# Altium PCB Overview.PcbDoc
Units mm, origin at the board's own origin, x right, y up, seen from the top; angles counter-clockwise.
Board outline 152.4 x 101.6 mm, 2 copper layers (Top Layer, Bottom Layer); 99 components, 67 nets, 227 pads, 10 vias.
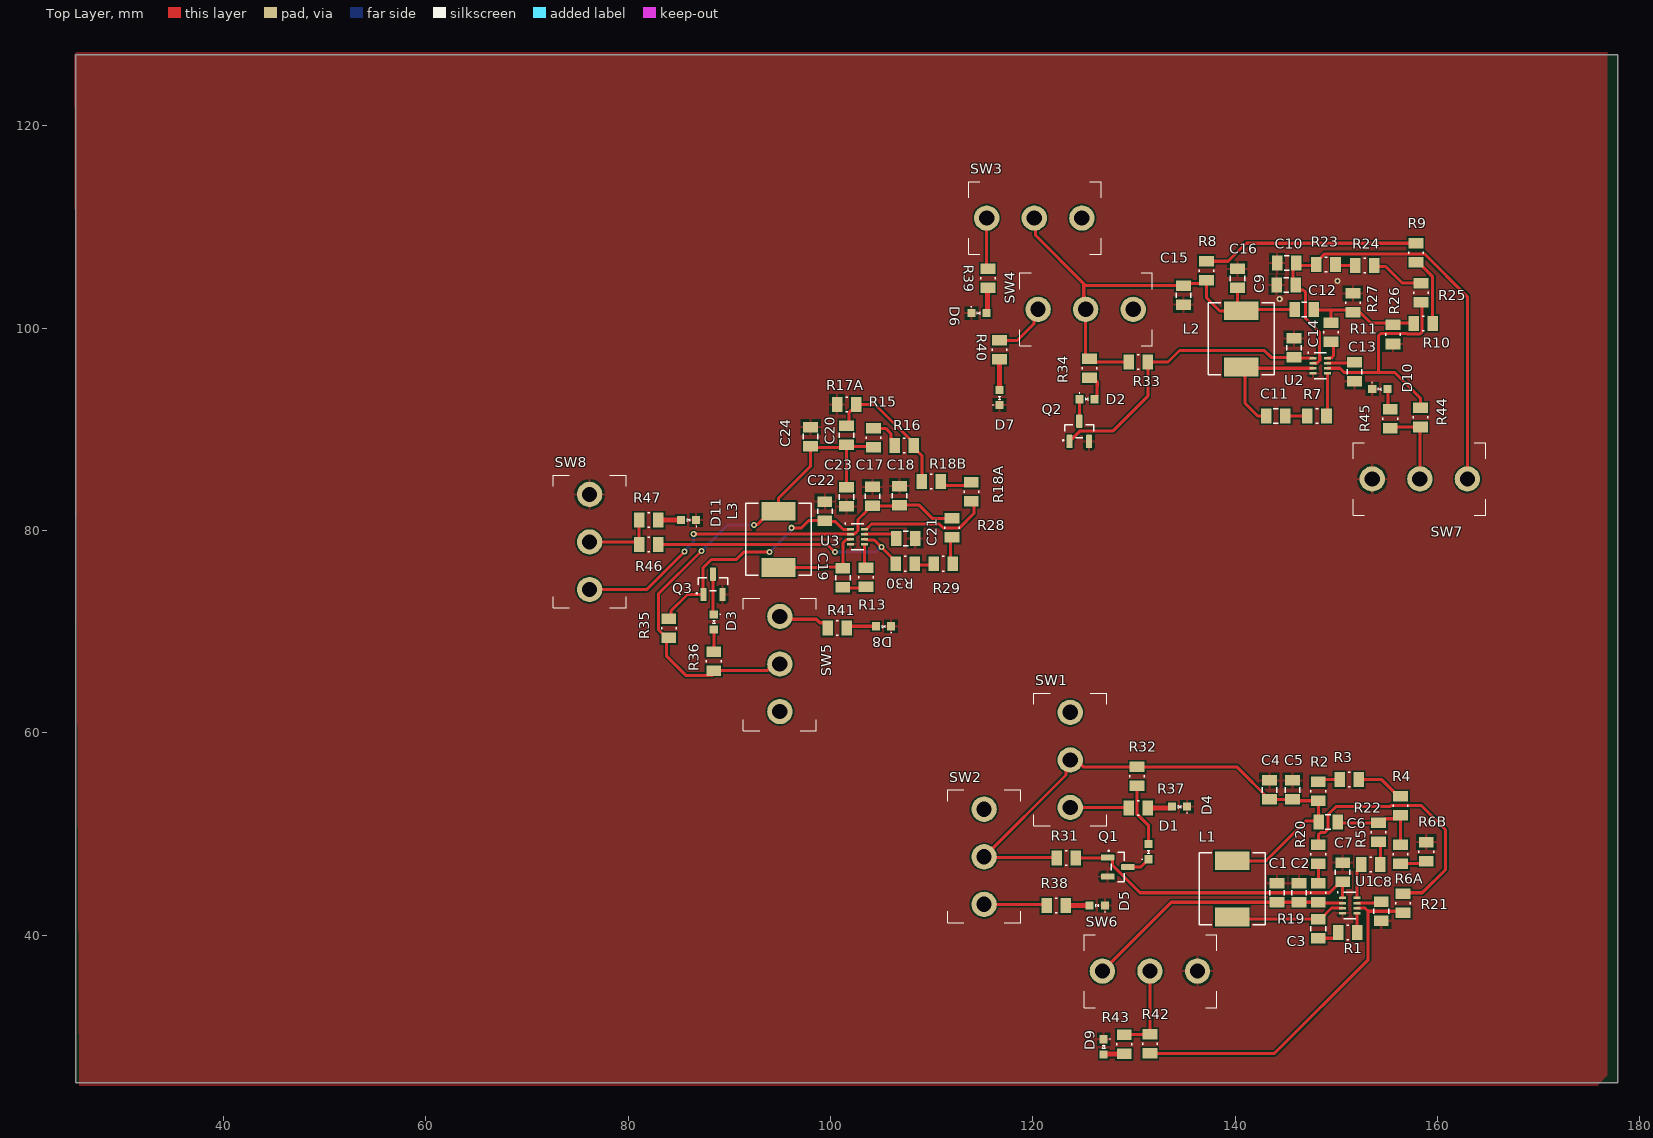
[diagram p0: Top Layer view]
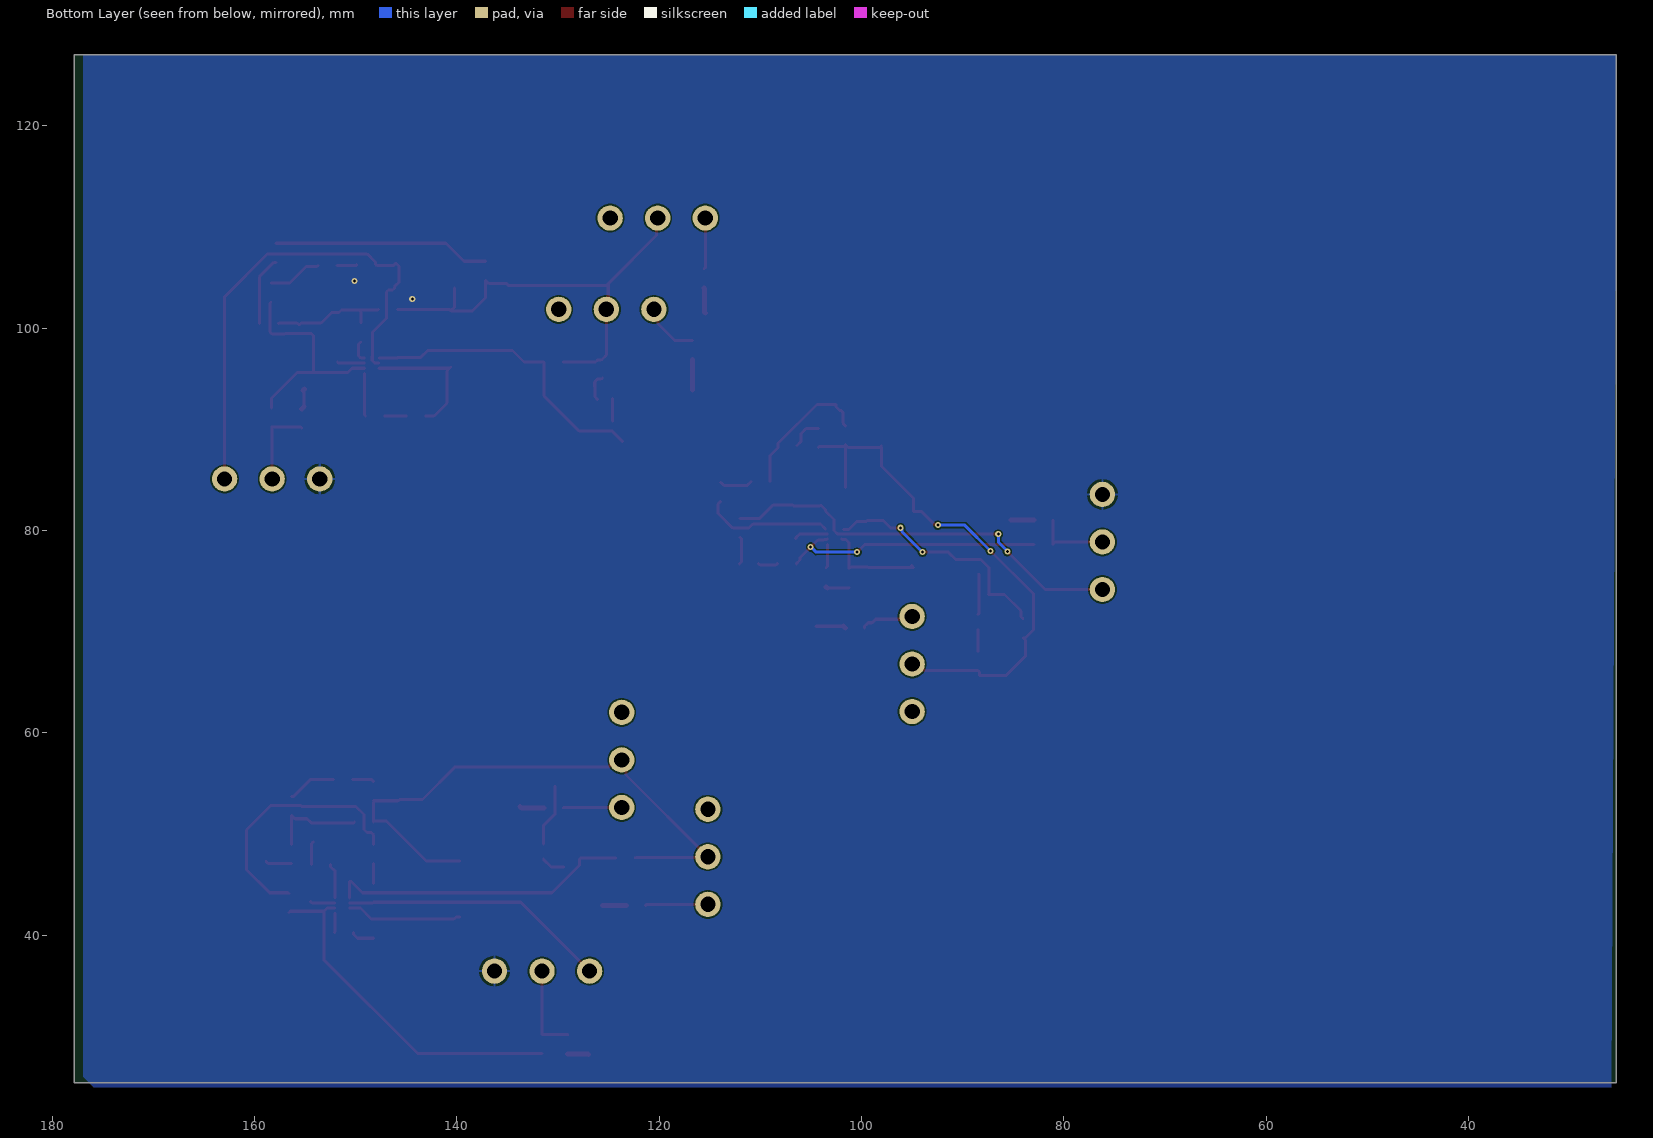
[diagram p1: Bottom Layer view, seen from below]
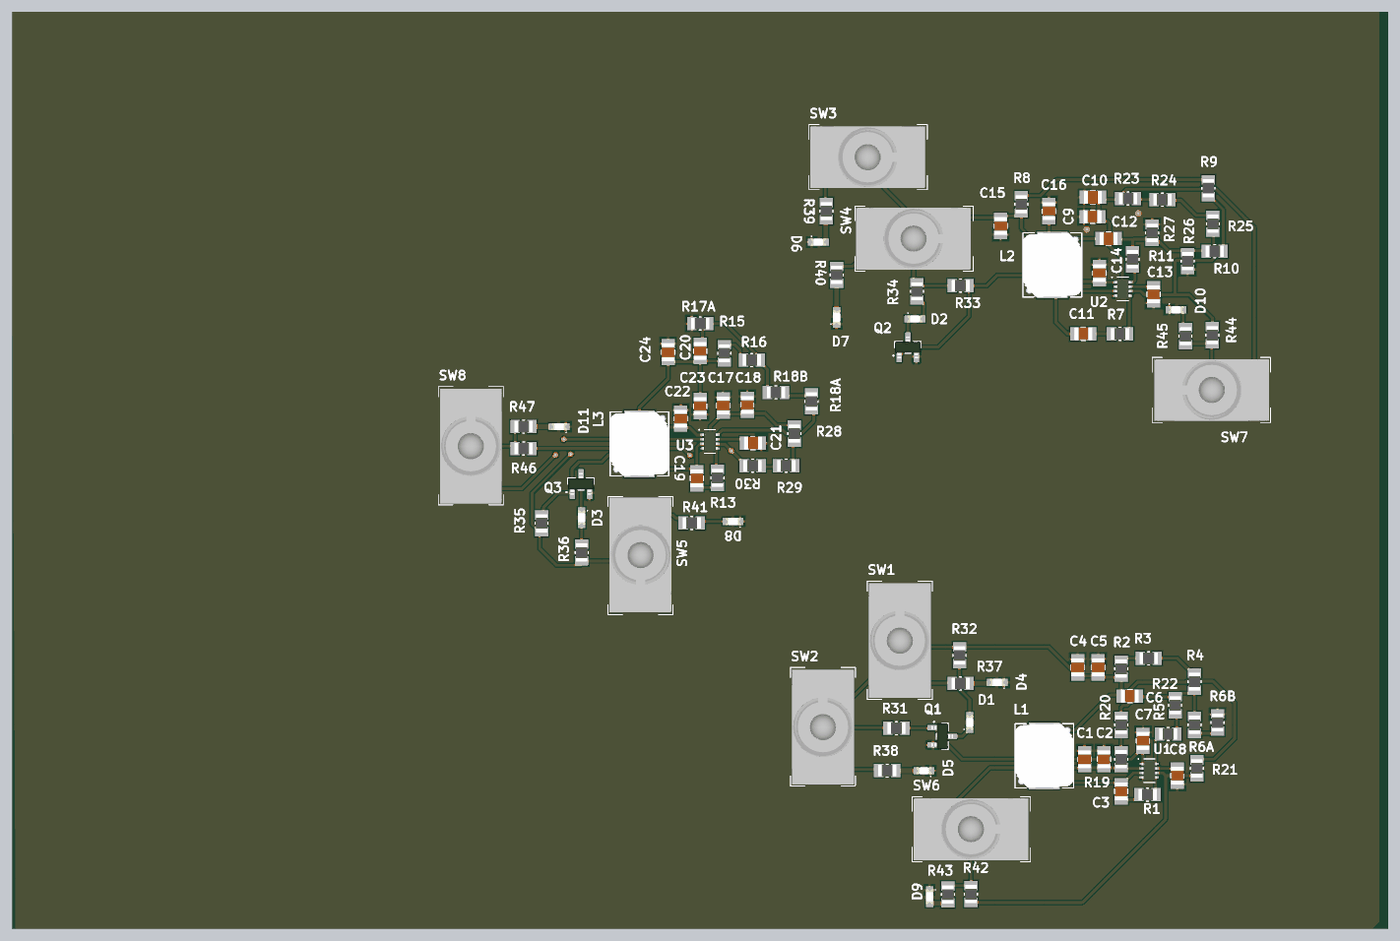
[diagram p2: 3D render of the assembled board from above, using the file's embedded part models]

## Layer stack, top to bottom
Top Solder: solder mask 0.0102, Solder Resist, Dk 3.5
Top Layer: signal copper 0.0356
Dielectric 1: dielectric 0.32, FR-4, Dk 4.8
Bottom Layer: signal copper 0.0356
Bottom Solder: solder mask 0.0102, Solder Resist, Dk 3.5

## Board outline
25.4,25.4 177.8,25.4 177.8,127 25.4,127

## Design rules (kind name [scope] priority, off if disabled: settings)
Clearance [All] p1: gap=0.152 ignorepadtopadclearanceinfootprint=FALSE
HoleSize [All] p1: absolutevalues=TRUE maxlimit=6.2 minlimit=0.3 maxpercent=80.000 minpercent=20.000
MinimumAnnularRing [All] p1: minimumring=0.15
MinimumSolderMaskSliver [All] p1: minsoldermaskwidth=0.1
PolygonConnect ViaConnect [IsVia] p1: connectstyle=Direct reliefconductorwidth=0.254 reliefentries=4 polygonreliefangle="90 Angle" airgapwidth=0.254
PolygonConnect [All] p2: connectstyle=Relief reliefconductorwidth=0.254 reliefentries=4 polygonreliefangle="90 Angle" airgapwidth=0.254
RoutingVias [All] p1: holewidth=0.3 width=0.6 viastyle="Through Hole" minholewidth=0.3 minwidth=0.5 maxholewidth=1 maxwidth=5
SilkToSilkClearance [All] p1: silktosilkclearance=0.1
SilkToSolderMaskClearance [IsPad] p1: minsilkscreentomaskgap=0.1 clearancetoexposedcopper=TRUE
SolderMaskExpansion [All] p1: expansion=0.051 istentingtop=FALSE
SupplyNets "Schematic Supply Nets_11" [InNet('8V_BUS')] p1: voltage=0.000
SupplyNets "Schematic Supply Nets_10" [InNet('8V_IN')] p2: voltage=0.000
SupplyNets "Schematic Supply Nets_9" [InNet('3V3_LUP_BUS')] p3: voltage=0.000
SupplyNets "Schematic Supply Nets_8" [InNet('GND')] p4: voltage=0.000
SupplyNets "Schematic Supply Nets_7" [InNet('5V_IN')] p5: voltage=0.000
SupplyNets "Schematic Supply Nets_6" [InNet('5V_LUP_BUS')] p6: voltage=0.000
SupplyNets "Schematic Supply Nets_5" [InNet('3V3_IN')] p7: voltage=0.000
SupplyNets "Schematic Supply Nets_4" [InNet('5V_BUS')] p8: voltage=0.000
SupplyNets "Schematic Supply Nets_3" [InNet('3V3_OUT')] p9: voltage=0.000
SupplyNets "Schematic Supply Nets_2" [InNet('8V_OUT')] p10: voltage=0.000
SupplyNets "Schematic Supply Nets_1" [InNet('3V3_BUS')] p11: voltage=0.000
SupplyNets "Schematic Supply Nets" [InNet('5V_OUT')] p12: voltage=0.000
Width [All] p1: maxlimit=25.4 minlimit=0.15 preferedwidth=0.3
26 further rules are at their usual default settings.

## Components (designator, comment, footprint, x,y, rotation, side; value= is the part's Value field where it differs from the comment)
C1 "22uF" CAPACITOR_0805_2012M-70N 144.145,44.196 r270 top
C2 "100uF" CAPACITOR_0805_2012M-70N 146.304,44.196 r270 top
C3 "1uF" CAPACITOR_0805_2012M-70N 148.209,40.64 r270 top
C4 "22uF" CAPACITOR_0805_2012M-70N 143.383,54.356 r270 top
C5 "22uF" CAPACITOR_0805_2012M-70N 145.669,54.356 r270 top
C6 "10pF" CAPACITOR_0805_2012M-70N 149.174,51.181 r0 top
C7 "1nF" CAPACITOR_0805_2012M-70N 150.622,46.228 r270 top
C8 "6.8nF" CAPACITOR_0805_2012M-70N 154.432,42.367 r90 top
C9 "100uF" CAPACITOR_0805_2012M-70N 145.034,104.267 r0 top
C10 "22uF" CAPACITOR_0805_2012M-70N 145.085,106.426 r0 top
C11 "1uF" CAPACITOR_0805_2012M-70N 144.018,91.313 r0 top
C12 "10pF" CAPACITOR_0805_2012M-70N 146.812,101.854 r0 top
C13 "6.8nF" CAPACITOR_0805_2012M-70N 151.794,95.685 r90 top
C14 "1nF" CAPACITOR_0805_2012M-70N 145.796,98.044 r270 top
C15 "22uF" CAPACITOR_0805_2012M-70N 134.874,103.251 r90 top
C16 "22uF" CAPACITOR_0805_2012M-70N 140.208,104.902 r270 top
C17 "22uF" CAPACITOR_0805_2012M-70N 104.14,83.363 r270 top
C18 "100uF" CAPACITOR_0805_2012M-70N 106.807,83.439 r270 top
C19 "1uF" CAPACITOR_0805_2012M-70N 101.219,75.311 r270 top
C20 "10pF" CAPACITOR_0805_2012M-70N 101.6,89.408 r90 top
C21 "1nF" CAPACITOR_0805_2012M-70N 107.442,79.209 r180 top
C22 "1nF" CAPACITOR_0805_2012M-70N 99.441,81.915 r270 top
C23 "22uF" CAPACITOR_0805_2012M-70N 101.6,83.312 r90 top
C24 "22uF" CAPACITOR_0805_2012M-70N 98.044,89.281 r270 top
D1 "LTST-C190 Series" LED_0603_1608M_0.80mm 131.445,48.26 r90 top
D2 "LTST-C190 Series" LED_0603_1608M_0.80mm 125.361,92.964 r0 top
D3 "LTST-C190 Series" LED_0603_1608M_0.80mm 88.47,70.955 r270 top
D4 "LTST-C190 Series" LED_0603_1608M_0.80mm 134.493,52.705 r180 top
D5 "LTST-C190 Series" LED_0603_1608M_0.80mm 126.365,42.926 r180 top
D6 "LTST-C190 Series" LED_0603_1608M_0.80mm 114.681,101.473 r0 top
D7 "LTST-C190 Series" LED_0603_1608M_0.80mm 116.713,93.142 r90 top
D8 "LTST-C190 Series" LED_0603_1608M_0.80mm 105.245,70.534 r180 top
D9 "LTST-C190 Series" LED_0603_1608M_0.80mm 127,28.968 r270 top
D10 "LTST-C190 Series" LED_0603_1608M_0.80mm 154.293,93.98 r0 top
D11 "LTST-C190 Series" LED_0603_1608M_0.80mm 85.979,81.026 r180 top
L1 "SPM6530T-3R3M100" IND_SPM6530T-1R5M100 139.7,44.577 r90 top
L2 "SPM6530T-4R7M100" IND_SPM6530T-1R5M100 140.589,98.933 r90 top
L3 "SPM6530T-4R7M100" IND_SPM6530T-1R5M100 94.869,79.121 r90 top
Q1 "MMBT619" SOT23-3N-1.15mm 128.397,46.736 r0 top
Q2 "MMBT619" SOT23-3N-1.15mm 124.587,89.805 r90 top
Q3 "MMBT619" SOT23-3N-1.15mm 88.392,74.676 r90 top
R1 "20" RESISTOR_0805_2012M-50N 151.13,40.259 r180 top
R2 "220" RESISTOR_0805_2012M-50N 148.209,54.229 r270 top
R3 "1k" RESISTOR_0805_2012M-50N 151.257,55.372 r180 top
R4 "39k" RESISTOR_0805_2012M-50N 156.337,52.781 r90 top
R5 "10k" RESISTOR_0805_2012M-50N 153.416,46.99 r0 top
R6A "12k" RESISTOR_0805_2012M-50N 156.337,48.006 r90 top
R6B "1k" RESISTOR_0805_2012M-50N 158.877,48.26 r270 top
R7 "20" RESISTOR_0805_2012M-50N 148.082,91.313 r180 top
R8 "220" RESISTOR_0805_2012M-50N 137.16,105.664 r270 top
R9 "1k" RESISTOR_0805_2012M-50N 157.861,107.442 r90 top
R10 "39k" RESISTOR_0805_2012M-50N 158.572,100.457 r0 top
R11 "15k" RESISTOR_0805_2012M-50N 149.479,99.568 r90 top
R13 "20" RESISTOR_0805_2012M-50N 103.505,75.362 r270 top
R15 "3.3k" RESISTOR_0805_2012M-50N 104.267,89.154 r270 top
R16 "39k" RESISTOR_0805_2012M-50N 107.315,88.392 r180 top
R17A "4.7k" RESISTOR_0805_2012M-50N 101.6,92.456 r0 top
R18A "10k" RESISTOR_0805_2012M-50N 113.919,83.82 r90 top
R18B "10k" RESISTOR_0805_2012M-50N 109.982,84.836 r180 top
R19 "330k" RESISTOR_0805_2012M-50N 148.209,44.196 r270 top
R20 "270k" RESISTOR_0805_2012M-50N 148.209,48.006 r90 top
R21 "3.9k" RESISTOR_0805_2012M-50N 156.591,43.18 r90 top
R22 "10k" RESISTOR_0805_2012M-50N 154.178,50.165 r90 top
R23 "330k" RESISTOR_0805_2012M-50N 148.971,106.299 r180 top
R24 "270k" RESISTOR_0805_2012M-50N 152.781,106.172 r0 top
R25 "3.9k" RESISTOR_0805_2012M-50N 158.369,103.505 r90 top
R26 "33k" RESISTOR_0805_2012M-50N 155.575,99.365 r90 top
R27 "10k" RESISTOR_0805_2012M-50N 151.638,102.489 r270 top
R28 "330k" RESISTOR_0805_2012M-50N 112.014,80.264 r270 top
R29 "270k" RESISTOR_0805_2012M-50N 111.125,76.708 r180 top
R30 "3.9k" RESISTOR_0805_2012M-50N 107.391,76.708 r0 top
R31 "*" RESISTOR_0805_2012M-50N 123.317,47.625 r180 top
R32 "*" RESISTOR_0805_2012M-50N 130.302,55.702 r270 top
R33 "*" RESISTOR_0805_2012M-50N 130.429,96.647 r180 top
R34 "*" RESISTOR_0805_2012M-50N 125.603,96.012 r270 top
R35 "*" RESISTOR_0805_2012M-50N 84.025,70.32 r270 top
R36 "*" RESISTOR_0805_2012M-50N 88.47,67.094 r90 top
R37 "*" RESISTOR_0805_2012M-50N 130.429,52.578 r180 top
R38 "*" RESISTOR_0805_2012M-50N 122.301,42.926 r180 top
R39 "*" RESISTOR_0805_2012M-50N 115.57,104.902 r90 top
R40 "*" RESISTOR_0805_2012M-50N 116.713,97.841 r90 top
R41 "*" RESISTOR_0805_2012M-50N 100.66,70.358 r180 top
R42 "*" RESISTOR_0805_2012M-50N 131.572,29.261 r270 top
R43 "*" RESISTOR_0805_2012M-50N 129.032,29.21 r270 top
R44 "*" RESISTOR_0805_2012M-50N 158.308,91.164 r90 top
R45 "*" RESISTOR_0805_2012M-50N 155.321,91.059 r90 top
R46 "*" RESISTOR_0805_2012M-50N 82.042,78.613 r0 top
R47 "*" RESISTOR_0805_2012M-50N 82.042,81.026 r0 top
SW1 "ANT11SF1CQE" ANT11SF1CQE 123.698,57.326 r0 top
SW2 "ANT11SF1CQE" ANT11SF1CQE 115.189,47.752 r0 top
SW3 "ANT11SF1CQE" ANT11SF1CQE 120.143,110.871 r270 top
SW4 "ANT11SF1CQE" ANT11SF1CQE 125.223,101.854 r270 top
SW5 "ANT11SF1CQE" ANT11SF1CQE 94.996,66.802 r180 top
SW6 "ANT11SF1CQE" ANT11SF1CQE 131.572,36.449 r270 top
SW7 "ANT11SF1CQE" ANT11SF1CQE 158.242,85.09 r90 top
SW8 "ANT11SF1CQE" ANT11SF1CQE 76.2,78.867 r0 top
U1 "MP2393GTL-Z" SOT-583-2.1mmx1.6mmBody-0.6mm 151.322,42.93 r0 top
U2 "MP2393GTL-Z" SOT-583-2.1mmx1.6mmBody-0.6mm 148.401,96.278 r0 top
U3 "MP2393GTL-Z" SOT-583-2.1mmx1.6mmBody-0.6mm 102.678,79.387 r0 top

## Footprints (in the part's own frame and the unit in brackets; to place one, negate y for a bottom-side part, rotate by r counter-clockwise, add the part's x,y. Pads: shape width x height; smd on the part's side, far side on the other; paste and mask are expansions set on the pad)
ANT11SF1CQE [mm] "Toggle switch, SPDT"
  round 2.5 hole 1.5: 1(0,-4.7) 2(0,0) 3(0,4.7)
  silkscreen extent -3.6,-6.5 3.6,6.6, body extent -3.43,-6.35 3.43,6.35, height 28.21
CAPACITOR_0805_2012M-70N [mm] "Capacitor, 0805 (2012 metric), 0.7mm high, nominal pads,"
  rect 1.04x1.47 smd mask+0.051: 1(-0.94,0) 2(0.94,0)
  silkscreen extent -0.25,-0.72 0.25,0.72, body extent -1,-0.73 1,0.73, height 1.23
IND_SPM6530T-1R5M100 [mm]
  rect 1.85x3.4 smd: 1(-2.775,0) 2(2.775,0)
  silkscreen extent -3.55,-3.25 3.55,3.25, body extent -3.55,-3.25 3.55,3.25, height 3
LED_0603_1608M_0.80mm [mm] "LED, 0603 (1608 metric), 0.8mm high"
  rect 0.8x0.8 smd mask+0.051: A(0.75,0) C(-0.75,0)
  silkscreen extent -0.79,-0.12 0.13,0.66, body extent -0.8,-0.4 0.8,0.4, height 0.8
RESISTOR_0805_2012M-50N [mm] "Resistor, 0805 (2012 metric), nominal pads"
  rect 1.04x1.47 smd mask+0.051: 1(-0.94,0) 2(0.94,0)
  silkscreen extent -0.1,-0.72 0.1,0.72, body extent -1,-0.63 1,0.62, height 0.5
SOT23-3N-1.15mm [mm] "SOT23, 3-pin, 1.15mm high, nominal pads"
  rrect25% 1.32x0.6 smd mask+0.051: 1(-1,0.95) 2(-1,-0.95) 3(1,0)
  silkscreen extent -0.93,-1.45 0.65,1.63, body extent -1.19,-1.45 1.21,1.45, height 0.91
SOT-583-2.1mmx1.6mmBody-0.6mm [mm] "SOT-583, 8 pins, 2.1 x 1.6mm body, nominal pads, 0.6mm high"
  rrect25% 0.7x0.25 smd: 1(-0.7,0.75) 2(-0.7,0.25) 3(-0.7,-0.25) 4(-0.7,-0.75) 5(0.7,-0.75) 6(0.7,-0.25) 7(0.7,0.25) 8(0.7,0.75)
  silkscreen extent -1.25,-1.3 0.6,1.35, body extent -0.85,-1.1 0.85,1.1, height 0.56

## Part data
C1 C2 C3 C4 C5 C6 C7 C8 C9 C10 C11 C12 C13 C14 C15 C16 C17 C18 C19 C20 C21 C22 C23 C24: library part "Generic Capacitor", "Passive - Capacitor, Generic", Tolerance=?%
D1 D2 D3 D4 D5 D6 D7 D8 D9 D10 D11: "Diode - LED, 0603", Package=0603, Rated Voltage="5V Reverse", Temp Range="-30°C ~ 85°C", APSS Standard Part="APSS Standard", Supplier 1=Digikey
L1 L2 L3: library part SPM6530T-1R5M100, "1.5 ÂµH Shielded Drum Core, Wirewound Inductor 11 A 10.67mOhm Max Nonstandard", Package="NON STANDARD-2 TDK", Check_prices=https://www.snapeda.com/parts/SPM6530T-1R5M100/TDK/view-part/?ref=eda, Digi-Key_Part_Number=445-3881-2-ND, MF=TDK, MP=SPM6530T-1R5M100, Purchase-URL=https://pricing.snapeda.com/search/part/SPM6530T-1R5M100/?ref=eda, SnapEDA_Link=https://www.snapeda.com/parts/SPM6530T-1R5M100/TDK/view-part/?ref=snap
Q1 Q2 Q3: "Transistor - BJT NPN MMBT619", Package=SOT-23-3, Power=350mW, Rated Voltage="50 Vce", Supplier 1 Part No.=4786-MMBT619CT-ND, Temp Range="-55°C ~ 150°C (TJ)", APSS Standard Part="APSS Standard", MF Part No.=MMBT619, Supplier 1=Digikey
R1 R2 R3 R4 R5 R6A R6B R7 R8 R9 R10 R11 R13 R15 R16 R17A R18A R18B R19 R20 R21 R22 R23 R24 R25 R26 R27 R28 R29 R30 R31 R32 R33 R34 R35 R36 R37 R38 R39 R40 R41 R42 R43 R44 R45 R46 R47: library part "Generic Resistor", "Passive - Resistor, Generic", Tolerance=?%
SW1 SW2 SW3 SW4 SW5 SW6 SW7 SW8: "Switch - Toggle, SPDT, 5A @ 28VDC", Package=-, Rated Current=5A, Rated Voltage="28 VDC", Supplier 1 Part No.=2449-ANT11SF1CQE-ND, Temp Range="-40°C ~ 85°C (TA)", Circuit=SPDT, MF Part No.=ANT11SF1CQE, Supplier 1=Digikey
U1 U2 U3: "IC - Regulator, Switching, 3A, 4.2V to 24V In, 0.8V to 13V Out, SOT-583", Package=SOT-583, Rated Voltage=24V, Supplier 1 Part No.=1589-MP2393GTL-ZCT-ND, Temp Range="-40°C ~ 125°C (TA)", MF Part No.=MP2393GTL-Z, Supplier 1=Digikey

## Via types
v1: diameter 0.6, hole 0.3, Top Layer to Bottom Layer, 10 vias

## Nets (pads, with @x,y where several pads share a name; then routed paths per layer and width w, separated by ;. In a path a pad name is that pad's centre, name@x,y a point inside that pad or via, vN(x,y) a via of type N, cw(c..) or ccw(c..) an arc to the next point about the centre after c; other vN are vias at no path point)
3V3_BUS: R37.2 SW1.1 | length 5.8
  Top Layer w0.3: SW1.1 129.441,52.626 R37.2
3V3_EN: R21.1 R42.2 U1.6 | length 34.9
  Top Layer w0.3: R42.2 143.891,28.321 153.142,37.572 153.142,42.367 ; U1.6 152.829,42.68 153.142,42.367 ; R21.1 156.464,42.367 153.142,42.367
3V3_IN: C1.2 C2.2 R19.2 SW6.1 U1.2 | length 26.6
  Top Layer w0.3: SW6.1 133.679,43.256 C1.2 C2.2 R19.2 148.285,43.18 U1.2
3V3_LUP_BUS: R38.2 SW2.1 | length 6.2
  Top Layer w0.3: SW2.1 121.235,43.052 R38.2
3V3_OUT: C4.2 C5.2 C6.1 L1.2 R2.2 R31.2 R32.1 SW1.2 SW2.2 | length 58.7
  Top Layer w0.3: R31.2 122.3,47.702 115.239,47.702 SW2.2 123.277,55.84 123.277,56.905 SW1.2 124.289,57.326 124.974,56.642 140.157,56.642 C4.2 C5.2 145.796,53.289 R2.2 ; L1.2 143.034,47.352 146.99,51.308 148.107,51.308 C6.1 R2.2@148.234,53.137
3V3_PG: C7.2 Q1.1 R31.1 U1.1 | length 30.2
  Top Layer w0.3: R31.1 127.764,47.625 127.853,47.536 127.853,46.936 130.593,44.196 149.315,44.196 150.407,45.288 C7.2 U1.1
5V_BUS: R39.2 SW3.1 | length 5.1
  Top Layer w0.3: SW3.1 SW3.1 115.442,105.97 R39.2
5V_EN: R25.1 R44.2 U2.6 | length 22.5
  Top Layer w0.3: U2.6 150.352,96.028 150.749,95.631 154.178,95.631 ; R44.2 158.308,93.074 156.76,94.622 155.751,95.631 154.178,95.631 ; R25.1 158.446,102.488 158.446,101.326 158.454,101.317 158.454,99.597 158.277,99.42 156.987,99.42 156.956,99.45 154.354,99.45 154.178,99.275 154.178,95.631
5V_IN: C9.2 C10.2 R23.2 SW7.1 U2.2 | length 49.2
  Top Layer w0.3: U2.2 147.726,96.553 148.11,96.553 148.353,96.796 148.353,97.26 148.336,97.277 148.336,99.587 146.93,100.994 146.93,103.58 146.754,103.755 146.344,103.755 146.168,103.932 146.168,104.073 145.72,104.521 145.72,106.121 C10.2 146.279,106.172 147.904,106.172 R23.2 148.031,106.514 148.853,107.336 158.709,107.336 162.942,103.104 SW7.1
5V_LUP_BUS: R40.2 SW4.1 | length 5.7
  Top Layer w0.3: R40.2 118.466,98.781 120.129,100.444 120.129,101.46 SW4.1
5V_OUT: C12.1 C15.2 C16.2 L2.2 R8.2 R33.2 R34.1 SW3.2 SW4.2 | length 46
  Top Layer w0.3: SW3.2 120.255,110.759 120.255,109.171 125.032,104.394 125.032,104.191 ; R33.2 126.289,96.647 126.111,96.825 125.73,96.825 R34.1 125.593,96.952 125.223,97.322 SW4.2 125.032,102.045 125.032,104.191 ; C16.2 140.208,102.089 L2.2 ; C12.1 140.735,101.854 L2.2 ; 125.032,104.191 C15.2 135.077,104.394 136.83,104.394 R8.2 137.16,102.997 138.449,101.708 L2.2
5V_PG: C14.2 Q2.1 R33.1 U2.1 | length 30.1
  Top Layer w0.3: Q2.1 124.675,89.843 127.943,89.843 131.369,93.269 R33.1 133.35,96.647 134.493,97.79 142.875,97.79 143.561,97.104 C14.2 145.872,97.028 U2.1
8V_BUS: R41.2 SW5.1 | length 5.3
  Top Layer w0.3: SW5.1 95.274,71.224 98.602,71.224 98.948,70.878 99.35,70.878 99.72,70.508 R41.2
8V_EN: R30.1 R46.2 U3.6 | length 26.8
  Top Layer w0.3: R46.2 99.695,78.613 v1(100.457,77.851) ; U3.6 103.403,79.112 103.683,79.112 103.731,79.064 104.325,79.064 106.081,77.309 106.081,77.078 R30.1
  Bottom Layer w0.3: v1(100.457,77.851) 104.476,77.851 104.984,78.359 v1(105.029,78.359)
8V_IN: C17.2 C18.2 R28.1 SW8.1 U3.2 | length 40.9
  Top Layer w0.3: SW8.1 81.851,74.167 v1(85.586,77.902) ; v1@86.449,79.637 U3.2 102.003,79.662 102.387,79.662 102.726,80 102.726,81.079 103.555,81.908 103.555,82.053 103.97,82.468 C17.2@104.115,82.468 ; C17.2 106.731,82.423 C18.2 108.763,82.499 110.058,81.204 R28.1
  Bottom Layer w0.3: v1@85.598,77.978 86.487,78.867 v1(86.487,79.629)
8V_OUT: C20.1 C23.2 C24.2 L3.2 R15.2 R35.2 R36.1 SW5.2 | length 52.8
  Top Layer w0.3: v1(87.249,77.978) 82.988,73.717 82.988,70.203 83.81,69.38 R35.2 83.82,69.175 83.82,67.564 85.7,65.684 88.342,65.684 88.342,66.026 R36.1 93.753,66.154 94.401,66.802 SW5.2 ; v1(92.456,80.518) 92.513,80.575 92.773,80.575 94.094,81.896 L3.2 94.869,83.185 98.044,86.36 C24.2@98.044,88.214 ; C24.2 98.171,88.214 101.346,88.214 C20.1 C23.2 ; C20.1@101.727,88.29 104.191,88.29 R15.2
  Bottom Layer w0.3: v1(87.249,77.978) 89.789,80.518 v1(92.456,80.518)
8V_PG: C22.2 Q3.1 R35.1 U3.1 | length 24.2
  Top Layer w0.3: R35.1 84.246,71.481 84.246,72.054 85.868,73.676 Q3.1 87.393,73.725 87.393,76.286 88.229,77.122 90.699,77.122 91.429,77.851 v1(93.98,77.851) ; v1(96.139,80.264) 97.142,80.264 97.853,80.975 C22.2 99.51,80.906 100.45,80.906 101.267,80.089 101.755,80.089 U3.1@101.778,80.112
  Bottom Layer w0.3: v1(93.98,77.851) 96.012,79.883 96.012,80.137 v1(96.139,80.264)
GND: C1.1 C2.1 C4.1 C5.1 C7.1 C8.1 C9.1 C10.1 C13.1 C14.1 C15.1 C16.1 C17.1 C18.1 C21.1 C22.1 C23.1 C24.1 D4.C D5.C D6.C D7.C D8.C D9.C D10.C D11.C Q1.2 Q2.2 Q3.2 R6B.1 R17A.1 R26.1 R27.1 SW6.3 SW7.3 SW8.3 U1.4 U2.4 U3.4
  other v1: 144.399,102.87 150.114,104.648
NetC3_1: C3.1 L1.1 U1.3 | length 11.5
  Top Layer w0.3: L1.1 140.081,41.802 140.303,41.58 C3.1 148.424,41.58 149.524,42.68 U1.3
NetC3_2: C3.2 R1.2 | length 2.3
  Top Layer w0.3: C3.2 149.82,39.7 150.19,40.07 R1.2
NetC6_2: C6.2 R4.1 R6A.2 R22.2 | length 9.5
  Top Layer w0.3: C6.2 150.19,51.105 R22.2 154.393,51.105 154.799,51.511 156.007,51.511 R4.1 R6A.2
NetC8_2: C8.2 U1.7 | length 2.5
  Top Layer w0.3: U1.7 154.305,43.18 C8.2
NetC11_1: C11.1 L2.1 U2.3 | length 13.3
  Top Layer w0.3: L2.1 L2.1@140.719,96.028 ; C11.1 142.24,91.313 140.97,92.583 140.97,95.777 L2.1@140.719,96.028 ; U2.3 L2.1@140.719,96.028
NetC11_2: C11.2 R7.2 | length 2.2
  Top Layer w0.3: C11.2 R7.2
NetC12_2: C12.2 R10.1 R11.2 R26.2 R27.2 | length 12
  Top Layer w0.3: C12.2 147.835,101.771 149.479,101.771 R11.2 ; 149.46,101.622 149.636,101.798 150.659,101.798 150.665,101.792 151.395,101.792 R27.2 152.361,101.549 153.402,100.508 155.372,100.508 R26.2 155.676,100.406 155.778,100.508 157.581,100.508 R10.1
NetC13_2: C13.2 U2.7 | length 2.7
  Top Layer w0.3: U2.7 151.697,96.528 C13.2
NetC19_1: C19.1 L3.1 U3.3 | length 10.1
  Top Layer w0.3: L3.1@95.071,76.548 L3.1 99.322,76.346 99.354,76.378 101.092,76.378 C19.1 101.219,78.762 101.569,79.112 101.953,79.112 U3.3
NetC19_2: C19.2 R13.2 | length 2.4
  Top Layer w0.3: C19.2 101.295,74.295 R13.2@103.378,74.295
  Top Layer w0.5: R13.2@103.378,74.295 R13.2
NetC20_2: C20.2 R16.1 R17A.2 R18B.2 | length 14
  Top Layer w0.3: C20.2 101.854,90.602 101.854,91.695 102.03,91.871 102.17,91.871 102.54,92.241 R17A.2 104.406,92.456 108.255,88.607 108.255,88.177 109.042,87.39 R18B.2
NetC21_2: C21.2 U3.7 | length 3.3
  Top Layer w0.3: U3.7 106.132,79.637 106.502,79.267 C21.2
NetD1_A: D1.A R32.2 | length 6.2
  Top Layer w0.3: R32.2 130.302,53.448 130.311,53.438 130.311,51.953 131.445,50.819 D1.A
NetD1_C: D1.C Q1.3 | length 2.4
  Top Layer w0.3: Q1.3 130.671,46.736 D1.C
NetD2_A: D2.A R34.2 | length 2.8
  Top Layer w0.3: R34.2 125.73,94.945 126.111,94.945 126.365,94.691 126.365,94.211 126.349,94.195 126.349,93.202 D2.A
NetD2_C: D2.C Q2.3 | length 2.3
  Top Layer w0.3: Q2.3 124.611,90.829 D2.C@124.611,93.051
NetD3_A: D3.A R36.2 | length 2.2
  Top Layer w0.3: R36.2 D3.A
NetD3_C: D3.C Q3.3 | length 4
  Top Layer w0.3: Q3.3 88.407,75.661 88.407,71.769 D3.C
NetD4_A: D4.A R37.1 | length 2.4
  Top Layer w0.5: R37.1 133.616,52.578 D4.A
NetD5_A: D5.A R38.1 | length 2.4
  Top Layer w0.5: R38.1 D5.A
NetD6_A: D6.A R39.1 | length 2.5
  Top Layer w0.5: D6.A 115.501,101.542 115.501,103.892 R39.1
NetD7_A: D7.A R40.1 | length 3
  Top Layer w0.5: D7.A R40.1
NetD8_A: D8.A R41.1 | length 3
  Top Layer w0.3: R41.1@101.776,70.534 D8.A
  Top Layer w0.5: R41.1 R41.1@101.776,70.534
NetD9_A: D9.A R43.2 | length 2.1
  Top Layer w0.5: D9.A 127.026,28.244 129.006,28.244 R43.2
NetD10_A: D10.A R45.2 | length 2.9
  Top Layer w0.3: D10.A@155.118,93.905 155.078,93.865 R45.2@155.078,92.242 ; R45.2@155.078,92.242 R45.2 R45.2@155.078,92.242
  Top Layer w0.5: D10.A D10.A@155.193,93.83 ; R45.2@155.078,92.242 R45.2
NetD11_A: D11.A R47.2 | length 2.2
  Top Layer w0.5: R47.2 D11.A
NetR1_1: R1.1 U1.5 | length 1.9
  Top Layer w0.3: U1.5 152.022,40.307 R1.1
NetR2_1: R2.1 R3.2 | length 2.2
  Top Layer w0.3: R2.1 148.412,55.372 R3.2
NetR3_1: R3.1 R4.2 | length 4.8
  Top Layer w0.3: R3.1 154.471,55.372 156.122,53.721 R4.2
NetR5_1: R5.1 U1.8 | length 3.5
  Top Layer w0.3: U1.8 152.022,46.321 152.476,46.775 R5.1
NetR5_2: R5.2 R22.1 | length 2.3
  Top Layer w0.3: R22.1 154.356,49.047 R5.2
NetR6A_1: R6A.1 R6B.2 | length 2.6
  Top Layer w0.3: R6A.1 158.623,47.066 R6B.2
NetR7_1: R7.1 U2.5 | length 4.2
  Top Layer w0.3: R7.1 149.101,91.392 149.101,91.615 U2.5
NetR8_1: R8.1 R9.2 | length 21.4
  Top Layer w0.3: R8.1 139.287,106.604 141.065,108.382 R9.2
NetR9_1: R9.1 R10.2 | length 6.9
  Top Layer w0.3: R9.1 158.076,106.502 159.512,105.066 R10.2
NetR11_1: R11.1 U2.8 | length 2.2
  Top Layer w0.3: U2.8 149.479,97.028 149.733,97.282 149.733,98.374 R11.1
NetR13_1: R13.1 U3.5 | length 2.4
  Top Layer w0.3: U3.5@103.378,78.612 103.378,76.429 R13.1
NetR15_1: R15.1 R16.2 | length 3.3
  Top Layer w0.3: R15.1 105.452,90.094 106.005,89.541 106.005,88.762 R16.2
NetR18A_1: R18A.1 U3.8 | length 12.9
  Top Layer w0.3: U3.8@103.578,80.162 104.061,80.645 110.744,80.645 111.164,80.225 112.718,80.225 114.173,81.68 114.173,82.626 R18A.1
NetR18A_2: R18A.2 R18B.1 | length 3.3
  Top Layer w0.3: R18B.1 110.922,84.825 111.292,84.455 113.614,84.455 R18A.2
NetR19_1: R19.1 R20.1 | length 1.9
  Top Layer w0.3: R19.1 R20.1
NetR20_2: R20.2 R21.2 | length 25.7
  Top Layer w0.3: R20.2 148.209,49.916 148.437,50.144 148.879,50.144 149.174,50.438 149.174,51.924 149.971,52.721 155.346,52.721 155.458,52.832 158.369,52.832 160.782,50.419 160.782,46.482 158.496,44.196 156.667,44.196 R21.2
NetR23_1: R23.1 R24.1 | length 2.1
  Top Layer w0.3: R23.1 149.911,106.172 R24.1
NetR24_2: R24.2 R25.2 | length 5.4
  Top Layer w0.3: R24.2 153.797,106.096 154.858,106.096 156.509,104.445 R25.2
NetR28_2: R28.2 R29.1 | length 2.8
  Top Layer w0.3: R28.2 111.873,79.183 111.873,76.9 R29.1
NetR29_2: R29.2 R30.2 | length 2
  Top Layer w0.3: R30.2 108.458,76.581 110.058,76.581 R29.2
NetR42_1: R42.1 R43.1 SW6.2 | length 8.8
  Top Layer w0.3: R43.1 129.083,30.201 R42.1 SW6.2
NetR44_1: R44.1 R45.1 SW7.2 | length 8.2
  Top Layer w0.3: R45.1 155.426,90.224 R44.1 158.242,90.158 SW7.2
NetR46_1: R46.1 R47.1 SW8.2 | length 7.4
  Top Layer w0.3: SW8.2 80.848,78.867 R46.1 R47.1
pads on no net: SW1.3 SW2.3 SW3.3 SW4.3 SW5.3

## Polygon pours and split planes (outlines as drawn)
GND on Bottom Layer "GND_L02_P002" (solid, pour order 2): 25.38,126.829 25.634,127.083 176.891,127.083 176.891,25.991 175.875,24.975 25.888,24.975
GND on Top Layer "GND_L01_P000" (solid, pour order 0): 25.273,127 25.527,127.254 176.784,127.254 176.784,26.162 175.768,25.146 25.781,25.146